# Altium PCB SOIL_MOISTURE_3IN.PcbDoc
Units mil, origin at the board's own origin, x right, y up, seen from the top; angles counter-clockwise.
Board outline 3380 x 2540 mil, 2 copper layers (Top Layer, Bottom Layer); 47 components, 41 nets, 152 pads, 34 vias.
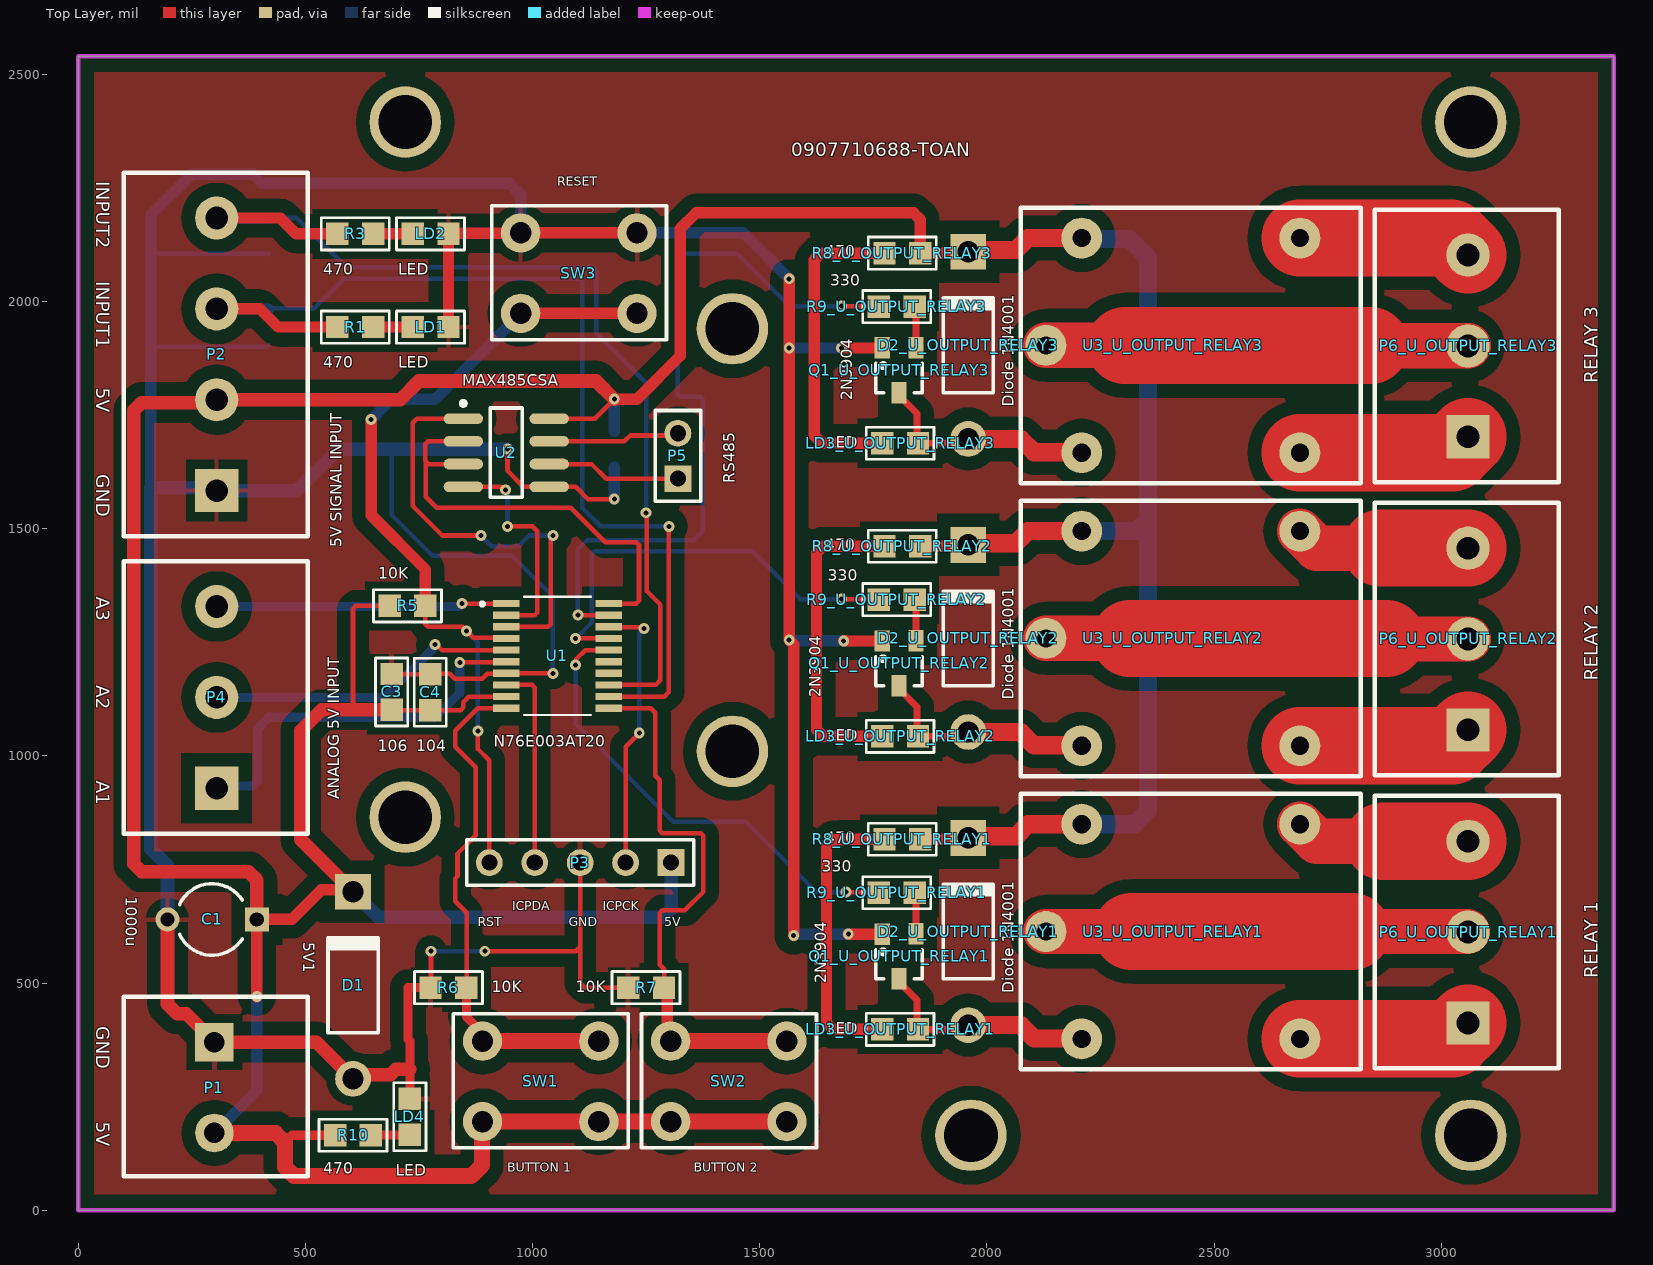
[diagram p0: Top Layer view]
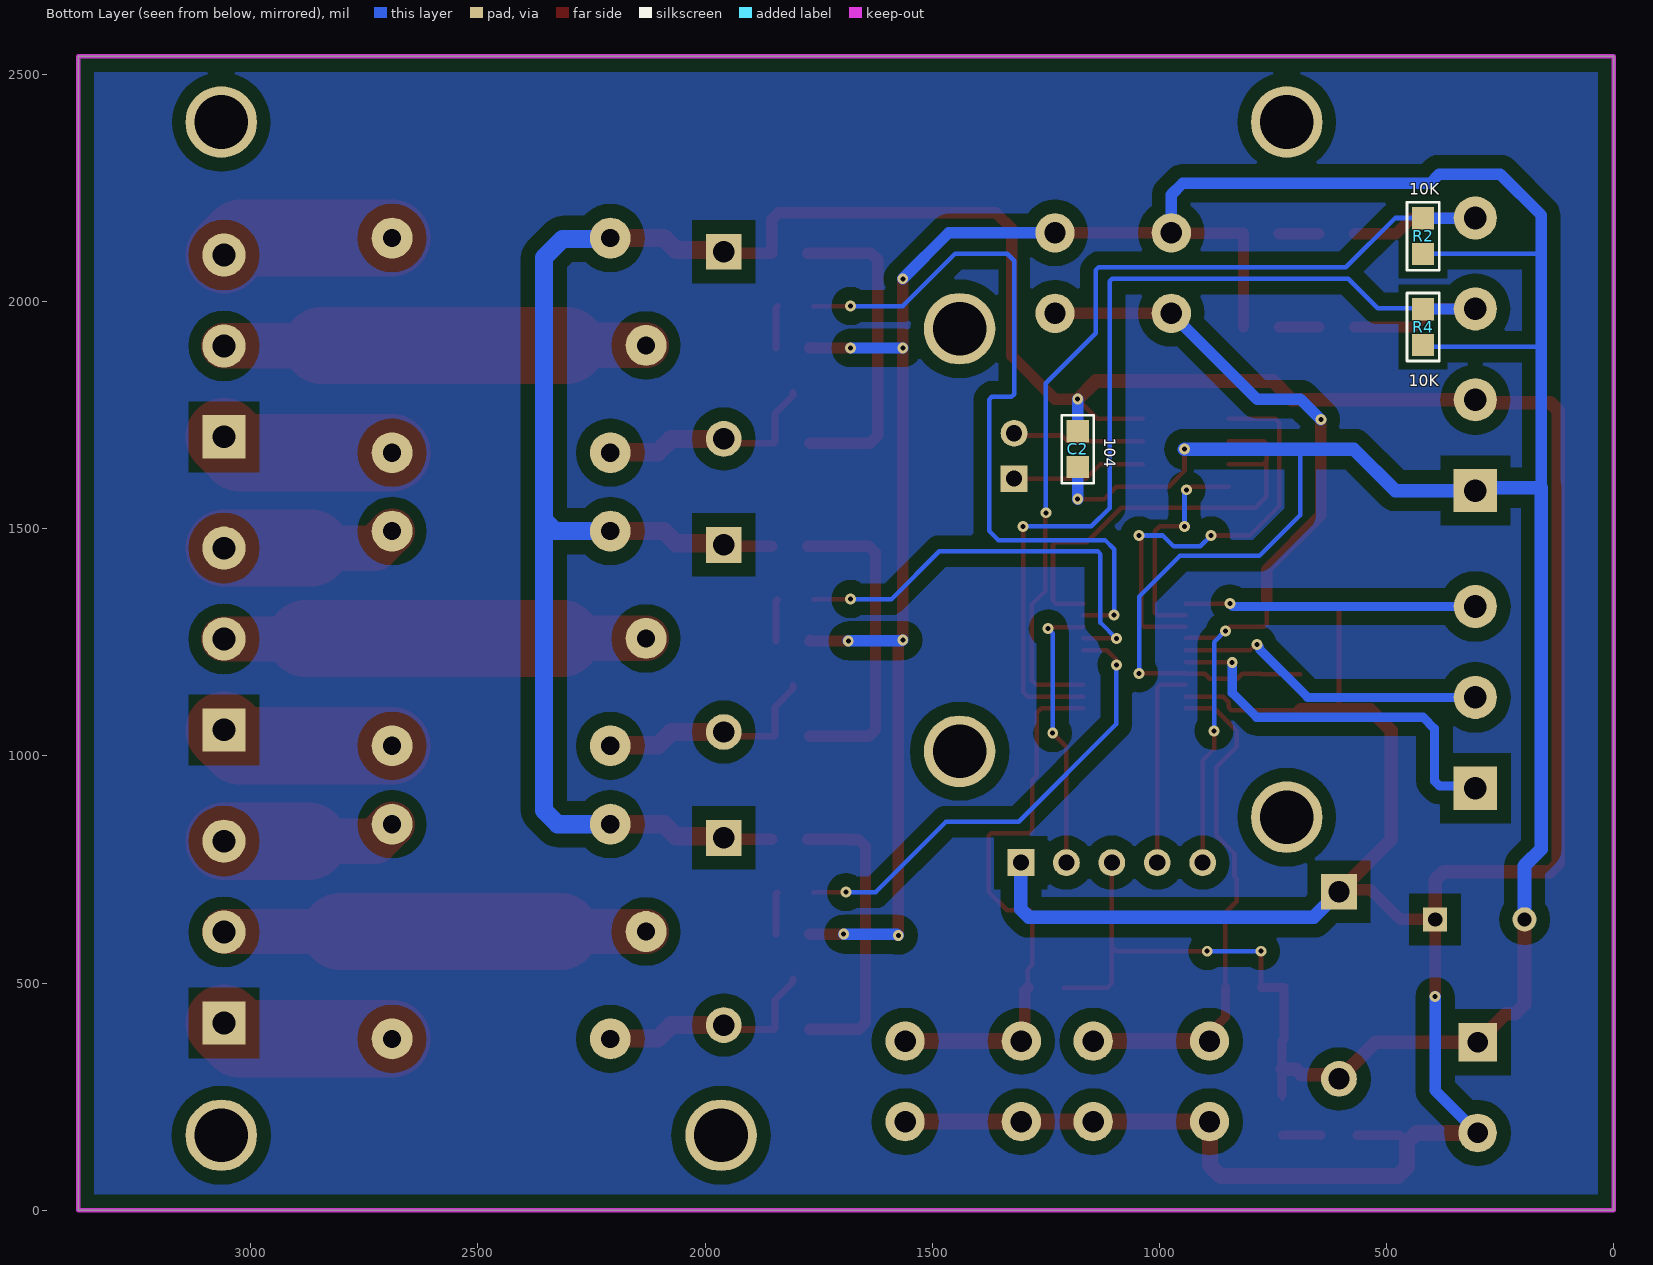
[diagram p1: Bottom Layer view, seen from below]

## Layer stack, top to bottom
Top Solder: solder mask 0.4, Solder Resist, Dk 3.5
Top Layer: signal copper 1.4
Dielectric 1: dielectric 12.6, FR-4, Dk 4.8
Bottom Layer: signal copper 1.4
Bottom Solder: solder mask 0.4, Solder Resist, Dk 3.5

## Board outline
0,0 3380,0 3380,2540 0,2540

## Design rules (kind name [scope] priority, off if disabled: settings)
Clearance Clearance_POLYGON_POUR [InPolygon] p1: gap=30 ignorepadtopadclearanceinfootprint=FALSE
Clearance [All] p2: gap=7 ignorepadtopadclearanceinfootprint=FALSE
ComponentClearance [All] p1: gap=5 collisioncheckmode=3 verticalgap=10 showdistances=FALSE
HoleSize [All] p1: absolutevalues=TRUE maxlimit=400 minlimit=1 maxpercent=80.000 minpercent=20.000
MinimumSolderMaskSliver [All] p1: minsoldermaskwidth=3
PlaneClearance [All] p1: clearance=30
PolygonConnect [All] p1: connectstyle=Relief reliefconductorwidth=10 reliefentries=4 polygonreliefangle="90 Angle" airgapwidth=20
RoutingVias [All] p1: holewidth=11 width=24 viastyle="Through Hole" minholewidth=11 minwidth=24 maxholewidth=11 maxwidth=24
SilkToSilkClearance [All] p1: silktosilkclearance=0
SilkToSolderMaskClearance [IsPad] p1: minsilkscreentomaskgap=1 clearancetoexposedcopper=TRUE
SolderMaskExpansion [All] p1: expansion=10
Width PWR [(InNet('3V3') or InNet('+5') or InNet('GND'))] p1: maxlimit=200 minlimit=10 preferedwidth=15 minimp=50.000000 maximp=50.000000 favimp=50.000000
Width [All] p2: maxlimit=200 minlimit=8 preferedwidth=10 minimp=50.000000 maximp=50.000000 favimp=50.000000
24 further rules are at their usual default settings.

## Classes and differential pairs
channel class OUTPUT_RELAY: U_OUTPUT_RELAY1 U_OUTPUT_RELAY2 U_OUTPUT_RELAY3
net class OUTPUT[1..3]: OUTPUT1 OUTPUT2 OUTPUT3
component class U_SOIL_MOISTURE_3IN: C1 C2 C3 C4 D1 LD1 LD2 LD4 P1 P2 P3 P4 P5 R1 R2 R3 R4 R5 R6 R7 R10 SW1 SW2 SW3 U1 U2
component class U_OUTPUT_RELAY3: D2_U_OUTPUT_RELAY3 LD3_U_OUTPUT_RELAY3 P6_U_OUTPUT_RELAY3 Q1_U_OUTPUT_RELAY3 R8_U_OUTPUT_RELAY3 R9_U_OUTPUT_RELAY3 U3_U_OUTPUT_RELAY3
component class U_OUTPUT_RELAY2: D2_U_OUTPUT_RELAY2 LD3_U_OUTPUT_RELAY2 P6_U_OUTPUT_RELAY2 Q1_U_OUTPUT_RELAY2 R8_U_OUTPUT_RELAY2 R9_U_OUTPUT_RELAY2 U3_U_OUTPUT_RELAY2
component class U_OUTPUT_RELAY1: D2_U_OUTPUT_RELAY1 LD3_U_OUTPUT_RELAY1 P6_U_OUTPUT_RELAY1 Q1_U_OUTPUT_RELAY1 R8_U_OUTPUT_RELAY1 R9_U_OUTPUT_RELAY1 U3_U_OUTPUT_RELAY1

## Components (designator, comment, footprint, x,y, rotation, side; value= is the part's Value field where it differs from the comment)
C1 "1000u" CAPR5-4X5 295,640 r180 top
C2 "104" Resistor 1180,1675 r270 bottom
C3 "106" Resistor 690,1140.63 r90 top
C4 "104" Resistor 775,1140 r90 top
D1 "5V1" DO-41 605,495 r90 top
D2_U_OUTPUT_RELAY1 "Diode 1N4001" DO-41 1959.06,613.39 r90 top (schematic designator D2)
D2_U_OUTPUT_RELAY2 "Diode 1N4001" DO-41 1959.06,1258.39 r90 top (schematic designator D2)
D2_U_OUTPUT_RELAY3 "Diode 1N4001" DO-41 1959.06,1903.39 r90 top (schematic designator D2)
LD1 "LED" LED_SMD 736.26,1943.74 r0 top
LD2 "LED" LED_SMD 736.26,2148.74 r0 top
LD3_U_OUTPUT_RELAY1 "LED" LED_SMD 1769.65,397.95 r0 top (schematic designator LD3)
LD3_U_OUTPUT_RELAY2 "LED" LED_SMD 1769.65,1042.95 r0 top (schematic designator LD3)
LD3_U_OUTPUT_RELAY3 "LED" LED_SMD 1769.65,1687.95 r0 top (schematic designator LD3)
LD4 "LED" LED_SMD 730,166.26 r90 top
P1 "POWER" "2 PIN TERMINAL" 300,370 r270 top
P2 "5V SIGNAL INPUT" "4 PIN TERMINAL" 305,1583.74 r90 top
P3 "PROG" HDR1X5 1305,765 r180 top
P4 "ANALOG 5V INPUT" "3 PIN TERMINAL" 305,928.74 r90 top
P5 "RS485" HDR1X2 1320,1610 r90 top
P6_U_OUTPUT_RELAY1 "Header 2" "3 PIN TERMINAL" 3059.06,412.17 r90 top (schematic designator P6)
P6_U_OUTPUT_RELAY2 "Header 2" "3 PIN TERMINAL" 3059.06,1057.17 r90 top (schematic designator P6)
P6_U_OUTPUT_RELAY3 "Header 2" "3 PIN TERMINAL" 3059.06,1702.17 r90 top (schematic designator P6)
Q1_U_OUTPUT_RELAY1 "2N3904" SOT23C 1806.65,558.74 r180 top (schematic designator Q1)
Q1_U_OUTPUT_RELAY2 "2N3904" SOT23C 1806.65,1203.74 r180 top (schematic designator Q1)
Q1_U_OUTPUT_RELAY3 "2N3904" SOT23C 1806.65,1848.74 r180 top (schematic designator Q1)
R1 "470" Resistor 610,1943.74 r0 top
R2 "10K" Resistor 420,2143.74 r270 bottom
R3 "470" Resistor 610,2148.74 r0 top
R4 "10K" Resistor 420,1943.74 r270 bottom
R5 "10K" Resistor 725,1330 r180 top
R6 "10K" Resistor 815,490 r0 top
R7 "10K" Resistor 1250,490 r0 top
R8_U_OUTPUT_RELAY1 "470" Resistor 1814.06,816.34 r180 top (schematic designator R8)
R8_U_OUTPUT_RELAY2 "470" Resistor 1814.06,1461.34 r180 top (schematic designator R8)
R8_U_OUTPUT_RELAY3 "470" Resistor 1814.06,2106.34 r180 top (schematic designator R8)
R9_U_OUTPUT_RELAY1 "330" Resistor 1801.65,698.74 r0 top (schematic designator R9)
R9_U_OUTPUT_RELAY2 "330" Resistor 1801.65,1343.74 r0 top (schematic designator R9)
R9_U_OUTPUT_RELAY3 "330" Resistor 1801.65,1988.74 r0 top (schematic designator R9)
R10 "470" Resistor 605,165 r0 top
SW1 "SW4 KT" SW4_6x6x8mm 1145.91,372.07 r180 top
SW2 "SW4 KT" SW4_6x6x8mm 1560,372.07 r180 top
SW3 "SW4 KT" SW4_6x6x8mm 1230,2150.9 r180 top
U1 "N76E003AT20" *SOP65P640X120-20N 1055,1220 r0 top
U2 "MAX485CSA" NSO8_N 942.2,1667.17 r0 top
U3_U_OUTPUT_RELAY1 "RELAY 5V TRIGGER" "RELAY 5V TRIGGER" 2130,613.39 r0 top (schematic designator U3)
U3_U_OUTPUT_RELAY2 "RELAY 5V TRIGGER" "RELAY 5V TRIGGER" 2130,1258.39 r0 top (schematic designator U3)
U3_U_OUTPUT_RELAY3 "RELAY 5V TRIGGER" "RELAY 5V TRIGGER" 2130,1903.39 r0 top (schematic designator U3)

## Footprints (in the part's own frame and the unit in brackets; to place one, negate y for a bottom-side part, rotate by r counter-clockwise, add the part's x,y. Pads: shape width x height; smd on the part's side, far side on the other; paste and mask are expansions set on the pad)
"2 PIN TERMINAL" [mil]
  rect 85x85 hole 45: 1(0,0)
  round 85 hole 45: 2(200,0)
  silkscreen extent -100,-200 295,205
"3 PIN TERMINAL" [mil]
  rect 95x95 hole 50: 1(0,0)
  round 95 hole 50: 2(200,0) 3(400,0)
  silkscreen extent -100,-200 500,205
"4 PIN TERMINAL" [mil]
  rect 95x95 hole 50: 1(0,0)
  round 95 hole 50: 2(200,0) 3(400,0) 4(600,0)
  silkscreen extent -100,-200 700,205
*SOP65P640X120-20N [mm]
  rect 1.48x0.41 smd: 1(-2.865,2.925) 2(-2.865,2.275) 3(-2.865,1.625) 4(-2.865,0.975) 5(-2.865,0.325) 6(-2.865,-0.325) 7(-2.865,-0.975) 8(-2.865,-1.625) 9(-2.865,-2.275) 10(-2.865,-2.925) 11(2.865,-2.925) 12(2.865,-2.275) 13(2.865,-1.625) 14(2.865,-0.975) 15(2.865,-0.325) 16(2.865,0.325) 17(2.865,0.975) 18(2.865,1.625) 19(2.865,2.275) 20(2.865,2.925)
  silkscreen extent -4.3,-3.3 1.87,3.3
CAPR5-4X5 [mm] "Capacitor; 2 Leads"
  rect 1.35x1.35 hole 0.8: 1(-2.5,0)
  round 1.35 hole 0.8: 2(2.5,0)
  silkscreen extent -1.69,-2 1.82,2
DO-41 [mm] "Diode, Axial; Body 5.2 x 2.7 mm (LxDia. max), Lead Dia. 0.86 mm (max)"
  round 2 hole 1.2: 1(-5.23,0)
  rect 2x2 hole 1.2: 2(5.23,0)
  silkscreen extent -2.65,-1.4 2.75,1.4
HDR1X2 [mm] "Connector; Header; 2 Position"
  rect 1.5x1.5 hole 0.9: 1(0,0)
  round 1.5 hole 0.9: 2(2.54,0)
  silkscreen extent -1.27,-1.27 3.81,1.27
HDR1X5 [mm] "Connector; Header; 5 Position"
  rect 1.5x1.5 hole 0.9: 1(0,0)
  round 1.5 hole 0.9: 2(2.54,0) 3(5.08,0) 4(7.62,0) 5(10.16,0)
  silkscreen extent -1.27,-1.27 11.43,1.27
LED_SMD [mm]
  rect 1.25x1.25 smd: 1(0,0) 2(2,0)
  silkscreen extent -0.9,-0.9 2.9,0.9
NSO8_N [mm] "SOIC, 8-Leads, Body 4.9x3.9mm, Pitch 1.27mm, IPC Medium Density"
  oval 2.2x0.6 smd: 1(-2.4,1.905) 2(-2.4,0.635) 3(-2.4,-0.635) 4(-2.4,-1.905) 5(2.4,-1.905) 6(2.4,-0.635) 7(2.4,0.635) 8(2.4,1.905)
  silkscreen extent -2.52,-2.5 0.9,2.88, body extent -2,-2.5 2,2.5, height 1.75
"RELAY 5V TRIGGER" [mil]
  round 90 hole 40: 1(78.74,236.22) 2(78.74,-236.22) 3(0,0) 4(559.06,-236.22) 5(559.06,236.22)
  silkscreen extent -55,-303 693,303
Resistor [mm] "0805"
  rect 1.25x1.25 smd: 1(-1,0) 2(1,0)
  silkscreen extent -1.9,-0.9 1.9,0.9
SOT23C [mm] "SOT 23C - 2-3-1 - BCE"
  rect 0.85x1.2 smd: 1(0.94,-1.245) 2(-0.95,-1.25) 3(0,1.25)
  silkscreen extent -1.3,-0.38 1.3,1.25, body extent -1.45,-1.4 1.45,1.4, height 1.3
SW4_6x6x8mm [mm]
  round 2.2 hole 1.2: 1(0,0) 1(6.5,0) 2(0,4.5) 2(6.5,4.498)
  silkscreen extent -1.65,-1.52 8.13,5.97, body extent -0.15,-0.86 6.65,5.34, height 8

## Part data
C1: library part Cap2, "Capacitor", PackageDescription="Capacitor; 2 Leads", PackageReference=CAPR5-4X5, Published=23-Sep-2002, Publisher="Altium Limited"
C2 C3 C4: library part "Cap Pol3", "Polarized Capacitor (Surface Mount)", LatestRevisionDate=29-May-2009, LatestRevisionNote="IPC-7351 Footprint Added.", PackageDescription="Chip Capacitor", PackageReference=C0805, Published=8-Jun-2000, Publisher="Altium Limited"
D1: library part "D Zener", "Zener Diode", LatestRevisionDate=17-Jul-2002, LatestRevisionNote="Re-released for DXP Platform.", PackageDescription="Diode, Thru-Hole; 2 Leads; 0.7 in Pin Spacing", PackageReference=DIODE-0.7, Published=8-Jun-2000, Publisher="Altium Limited"
D2_U_OUTPUT_RELAY1 D2_U_OUTPUT_RELAY2 D2_U_OUTPUT_RELAY3: "1 Amp General Purpose Rectifier", Code_JEDEC=DO-204-AL, ComponentLink1Description="Manufacturer Link", ComponentLink1URL=http://www.fairchildsemi.com/, ComponentLink2Description=Datasheet, ComponentLink2URL=http://www.fairchildsemi.com/ds/1N%2F1N4001.pdf, DatasheetVersion=1998, LatestRevisionDate=17-Jul-2002, LatestRevisionNote="Re-released for DXP Platform.", PackageDescription="Diode, Axial; Body 5.2 x 2.7 mm (LxDia. max), Lead Dia. 0.86 mm (max)", PackageReference=DO-41, PackageVersion=Aug-1999, Published=8-Jun-2000, Publisher="Altium Limited"
LD1 LD2 LD3_U_OUTPUT_RELAY1 LD3_U_OUTPUT_RELAY2 LD3_U_OUTPUT_RELAY3 LD4: library part LED_SMD, "0805", LatestRevisionDate=17-Jul-2002, LatestRevisionNote="Re-released for DXP Platform.", Publisher="Altium Limited"
P1: library part "2 PIN TERMINAL", "Header, 2-Pin", LatestRevisionDate=17-Jul-2002, LatestRevisionNote="Re-released for DXP Platform.", Publisher="Altium Limited"
P2: library part "4 PIN TERMINAL", "Header, 4-Pin", LatestRevisionDate=17-Jul-2002, LatestRevisionNote="Re-released for DXP Platform.", Publisher="Altium Limited"
P3: library part "Header 5", "Header, 5-Pin", LatestRevisionDate=17-Jul-2002, LatestRevisionNote="Re-released for DXP Platform.", Publisher="Altium Limited"
P4 P6_U_OUTPUT_RELAY1 P6_U_OUTPUT_RELAY2 P6_U_OUTPUT_RELAY3: library part "3 PIN TERMINAL", "Header, 2-Pin", LatestRevisionDate=17-Jul-2002, LatestRevisionNote="Re-released for DXP Platform.", Publisher="Altium Limited"
P5: library part "Header 2", "Header, 2-Pin", LatestRevisionDate=17-Jul-2002, LatestRevisionNote="Re-released for DXP Platform.", Publisher="Altium Limited"
Q1_U_OUTPUT_RELAY1 Q1_U_OUTPUT_RELAY2 Q1_U_OUTPUT_RELAY3: "NPN General Purpose Amplifier", PackageDocument=Sep-1998, Code_JEDEC=TO-92A, ComponentLink1Description="Manufacturer Link", ComponentLink1URL=http://www.fairchildsemi.com/, ComponentLink2Description=Datasheet, ComponentLink2URL=http://www.fairchildsemi.com/ds/2N%2F2N3904.pdf, DatasheetDocument=1997, LatestRevisionDate=15-Jan-2003, LatestRevisionNote="PCB Footprint 'BCY-W3/D4.7' replaced", PackageReference=TO-92A, Published=8-Jun-2000, Publisher="Altium Limited"
R1 R2 R3 R4 R5 R6 R7 R8_U_OUTPUT_RELAY1 R8_U_OUTPUT_RELAY2 R8_U_OUTPUT_RELAY3 R9_U_OUTPUT_RELAY1 R9_U_OUTPUT_RELAY2 R9_U_OUTPUT_RELAY3 R10: library part Resistor, "Resistor", LatestRevisionDate=17-Jul-2002, LatestRevisionNote="Re-released for DXP Platform.", Publisher="Altium Limited"
U1: "8051 Mcu, Shape: t", Package=None, Availability=Unavailable, MF=Nuvoton, MP=N76E003AT20-T, Price=None, SnapEDA_Link=https://www.snapeda.com/parts/N76E003AT20-T/Nuvoton/view-part/?ref=snap
U2: "Low-Power, Slew-Rate-Limited RS-485/RS-422 Transceiver", Code_IPC=SOIC127P600-8, Code_JEDEC=MS-012-AA, ComponentLink1Description="Manufacturer Link", ComponentLink1URL=http://www.maxim-ic.com/, ComponentLink2Description=Datasheet, ComponentLink2URL=http://pdfserv.maxim-ic.com/en/ds/MAX1487-MAX491.pdf, DatasheetVersion=Feb-1996, LatestRevisionDate=13-Apr-2006, LatestRevisionNote="IPC-7351 Footprint Added.", PackageDescription="8-Pin Small Outline Integrated Circuit 1.27 mm Pitch", PackageReference=NSO8, Published=16-Jan-2001, Publisher="Altium Limited"
U3_U_OUTPUT_RELAY1 U3_U_OUTPUT_RELAY2 U3_U_OUTPUT_RELAY3: "Header, 2-Pin", LatestRevisionDate=17-Jul-2002, LatestRevisionNote="Re-released for DXP Platform.", Publisher="Altium Limited"

## Free pads (board coordinates)
  round 157.48 hole 118.11: ""(720,865) ""(720,2395) ""(1440,1010) ""(1440,1940) ""(1965,165) ""(3065,165) ""(3065,2395)

## Via types
v1: diameter 24, hole 11, Top Layer to Bottom Layer, 34 vias

## Nets (pads, with @x,y where several pads share a name; then routed paths per layer and width w, separated by ;. In a path a pad name is that pad's centre, name@x,y a point inside that pad or via, vN(x,y) a via of type N, cw(c..) or ccw(c..) an arc to the next point about the centre after c; other vN are vias at no path point)
+5: C1.1 C2.1 C3.1 C4.1 D1.2 D2_U_OUTPUT_RELAY1.2 D2_U_OUTPUT_RELAY2.2 D2_U_OUTPUT_RELAY3.2 P1.2 P2.2 P3.1 R5.2 R8_U_OUTPUT_RELAY1.1 R8_U_OUTPUT_RELAY2.1 R8_U_OUTPUT_RELAY3.1 R10.1 SW1.2 SW2.2 U1.9 U2.8 U3_U_OUTPUT_RELAY1.1 U3_U_OUTPUT_RELAY2.1 U3_U_OUTPUT_RELAY3.1 | length 10929.9
  Top Layer w10: 455,149.5 464.52,159.02 ; R10.1@559.65,159.02 R10.1 ; 605,1101.26 605,1324.14 610.86,1330 R5.2 ; C3.1@690,1100.63 C4.1 841.86,1100.63 847.72,1106.49 847.72,1118.15 860,1130.43 U1.9 ; U2.8 1137.17,1742.17 v1(1180,1785) ; SW2.2@1559.95,194.95 SW2.2@1560,194.91
  Top Layer w20: 464.52,159.02 470.5,165 R10.1
  Top Layer w25: v1(393.43,470) C1.1 470,640 535,705 D1.2@600.91,705 ; v1(1180,1785) 1230,1785 1325,1880 1325,2160 1360,2195 1838.78,2195 1853.43,2180.36 R8_U_OUTPUT_RELAY3.1 1956.1,2106.34 D2_U_OUTPUT_RELAY3.2 ; R8_U_OUTPUT_RELAY1.1 1956.1,816.34 D2_U_OUTPUT_RELAY1.2 ; R8_U_OUTPUT_RELAY2.1 1956.1,1461.34 D2_U_OUTPUT_RELAY2.2
  Top Layer w30: C1.1 393.43,726.57 375,745 140.07,745 122.5,762.57 122.5,1759.93 140.07,1777.5 298.76,1777.5 P2.2 708.74,1783.74 750,1825 1140,1825 v1(1180,1785) ; D1.2 600.91,705 490,815.91 490,1055 536.26,1101.26 605,1101.26 689.37,1101.26 C3.1@690,1100.63
  Top Layer w35: P1.2 434.5,170 455,149.5 455,95.5 475.5,75 865,75 889.19,99.19 889.19,194.19 890,195 890.05,194.95 1145.86,194.95 1145.91,194.91 1145.95,194.95 1304.05,194.95 1304.09,195 1304.14,194.95 SW2.2@1559.95,194.95
  Top Layer w40: D2_U_OUTPUT_RELAY1.2 1962.72,822.95 2064.06,822.95 2090.71,849.61 U3_U_OUTPUT_RELAY1.1 ; D2_U_OUTPUT_RELAY2.2 1962.72,1467.95 2064.06,1467.95 2090.71,1494.61 U3_U_OUTPUT_RELAY2.1 ; D2_U_OUTPUT_RELAY3.2 1962.72,2112.95 2064.06,2112.95 2090.71,2139.61 U3_U_OUTPUT_RELAY3.1
  Bottom Layer w25: P1.2 393.43,263.43 v1(393.43,470) ; C2.1 v1(1180,1785)
  Bottom Layer w30: D1.2 660.91,645 1287.43,645 1305,662.57 P3.1
  Bottom Layer w40: U3_U_OUTPUT_RELAY1.1 2325,849.61 2355,879.61 2355,1519.61 ; U3_U_OUTPUT_RELAY2.1 2330,1494.61 2355,1519.61 ; U3_U_OUTPUT_RELAY3.1 2210.52,2137.83 2313.74,2137.83 2355,2096.57 2355,1519.61
AIN0: P4.1 U1.6 | length 858.7
  Top Layer w10: v1(840,1205) 841.1,1206.1 941.1,1206.1 U1.6
  Bottom Layer w20: P4.1 309.54,933.28 383.28,933.28 395,945 395,1060 420,1085 786.26,1085 840,1138.74 v1(840,1205)
AIN1: P4.2 U1.5 | length 693.3
  Top Layer w10: v1(785,1245) 788.79,1245 800.99,1232.8 U1.5
  Bottom Layer w20: P4.2 673.74,1128.74 780,1235 780,1238.92 785,1243.92 v1(785,1245)
AIN4: P4.3 U1.1 | length 639.9
  Top Layer w10: v1(845,1335) 845.08,1335.08 942.13,1335.08 U1.1
  Bottom Layer w20: P4.3 838.74,1328.74 v1(845,1335)
BUTTON_1: R6.2 SW1.1 U1.10 | length 1134.3
  Top Layer w10: R6.2 855,490.63 855,655 830,680 830,730 835,735 835,785 875,825 875,975 830,1020 830,1055 879.84,1104.84 U1.10
  Top Layer w20: R6.2 854.37,425.73 890,390.1 SW1.1@890,372.07
  Top Layer w35: SW1.1@890,372.07 SW1.1@1145.91,372.07
BUTTON_2: R7.2 SW2.1 U1.11 | length 1257.8
  Top Layer w10: U1.11 1260.16,1104.84 1270,1095 1270,956.18 1280,946.18 1280,835.86 1285.86,830 1370.4,830 1376.26,824.14 1376.26,701.26 1335,660 1285.86,660 1280,654.14 1280,540 1290,530 1290,490.63 R7.2
  Top Layer w25: R7.2 1296.73,482.64 1296.73,379.43 SW2.1@1304.09,372.07
  Top Layer w35: SW2.1@1304.09,372.07 SW2.1@1560,372.07
DE: U1.20 U2.2 U2.3 | length 993.3
  Top Layer w10: U2.3 771.57,1642.17 765,1648.74 ; U2.2 770.23,1692.17 764.37,1686.31 764.37,1649.37 765,1648.74 ; U1.20 1228.59,1335.16 1234.45,1341.02 1234.45,1464.14 1228.59,1470 1160,1470 1084.14,1545.86 789.14,1545.86 765,1570 765,1648.74
GND: C1.2 C2.2 C3.2 C4.2 D1.1 LD1.2 LD2.2 LD4.2 P1.1 P2.1 P3.3 Q1_U_OUTPUT_RELAY1.1 Q1_U_OUTPUT_RELAY2.1 Q1_U_OUTPUT_RELAY3.1 R2.2 R4.2 R6.1 R7.1 SW3.1 U1.7 U2.5 | length 10291.5
  Top Layer w10: C3.2 774.37,1180 C4.2 776.63,1181 817.87,1181 828.87,1170 889.35,1170 900.35,1181 941.59,1181 U1.7 v1(1045,1181.61) ; LD4.2 LD4.2@730,255 ; R6.1 776.63,491 v1(776.63,570) ; v1(895,570) 1095,570 1105,580 ; v1(945,1675) 945,1627.17 980,1592.17 U2.5 1095,1592.17 1122.17,1565 v1(1180,1565) ; P3.3 1105,580 ; R7.1 1115,490 1105,500 1105,580
  Top Layer w20: LD4.2@730,255 730,310 730,372.82 726.02,376.79 726.02,490 R6.1
  Top Layer w25: LD1.2 LD2.2 816.08,2149.82 973.01,2149.82 974.09,2150.9 SW3.1@1230,2150.9 ; v1(1565,2050) v1(1565,1897.74) v1(1565,1255) 1575,1245 v1(1575,605) ; v1(1680,1897.74) Q1_U_OUTPUT_RELAY3.1 Q1_U_OUTPUT_RELAY3.1@1769.44,1897.95 ; v1(1685,1252.95) 1689.21,1252.95 1689.43,1252.74 Q1_U_OUTPUT_RELAY2.1 Q1_U_OUTPUT_RELAY2.1@1767.39,1255 ; v1(1695,607.74) Q1_U_OUTPUT_RELAY1.1 Q1_U_OUTPUT_RELAY1.1@1769.44,607.95
  Top Layer w30: C1.2 196.57,453.43 217.79,432.21 237.79,432.21 P1.1 524.09,370 D1.1 614.33,298.42 687.52,298.42 699.09,310 730,310
  Bottom Layer w10: 160,1900 415.63,1900 R4.2 ; 160,2105 419.37,2105 R2.2 ; 690,1675 690,1530 780,1440 955,1440 1045,1350 v1(1045,1181.61) ; v1(776.63,570) v1(895,570)
  Bottom Layer w25: 160,1590 160,1900 160,2105 160,2190 250,2280 385,2280 405,2260 949.09,2260 974.09,2235 SW3.1@974.09,2150.9 ; v1(1180,1565) C2.2 ; SW3.1@1230,2150.9 1464.1,2150.9 v1(1565,2050) ; v1(1565,1255) 1567.05,1252.95 v1(1685,1252.95) ; v1(1565,1897.74) v1(1680,1897.74) ; v1(1575,605) 1577.74,607.74 v1(1695,607.74)
  Bottom Layer w30: C1.2 196.57,758.43 160,795 160,1590 298.74,1590 P2.1 481.26,1583.74 572.52,1675 690,1675 v1(945,1675)
ICPCK: P3.2 U1.18 | length 610.4
  Top Layer w10: U1.18 1169.09,1282.68 1242.32,1282.68 v1(1245,1280) ; P3.2 1205,1020 v1(1235,1050)
  Bottom Layer w10: v1(1235,1050) 1235,1270 v1(1245,1280)
ICPDA: P3.4 U1.8 | length 450.4
  Top Layer w10: U1.8 999.14,1156.02 1005,1150.17 P3.4
INPUT_1: P2.3 R1.1 R4.1 U1.12 | length 2324
  Top Layer w10: U1.12 1290,1130.43 1300,1140.43 v1(1300,1505)
  Top Layer w25: P2.3 400,1983.74 440,1943.74 R1.1
  Bottom Layer w10: R4.1@419.68,1983.42 421.26,1985 520,1985 585,2050 1104.14,2050 1110,2044.14 1110,1545 1150,1505 v1(1300,1505)
  Bottom Layer w25: P2.3 305.31,1983.42 R4.1@419.68,1983.42
INPUT_2: P2.4 R2.1 R3.1 U1.13 | length 2242
  Top Layer w10: U1.13 1271.18,1156.02 1281.14,1165.98 1281.14,1333.03 1251.45,1362.72 1251.45,1533.55 v1(1250,1535)
  Top Layer w25: P2.4 445,2183.74 480,2148.74 R3.1
  Bottom Layer w10: R2.1@419.69,2183.42 420,2183.74 481.26,2183.74 590,2075 1134.14,2075 1140,2069.14 1140,1930 1250,1820 v1(1250,1535)
  Bottom Layer w25: P2.4 305.32,2183.42 R2.1@419.69,2183.42
NetD2_U_OUTPUT_RELAY1_1: D2_U_OUTPUT_RELAY1.1 LD3_U_OUTPUT_RELAY1.2 Q1_U_OUTPUT_RELAY1.3 U3_U_OUTPUT_RELAY1.2 | length 505.7
  Top Layer w15: Q1_U_OUTPUT_RELAY1.3 1806.65,502.64 1846.34,462.95 1846.34,400.01 LD3_U_OUTPUT_RELAY1.2 1949.53,397.95 D2_U_OUTPUT_RELAY1.1
  Top Layer w40: D2_U_OUTPUT_RELAY1.1 2074.53,407.48 2103.74,378.27 2207.64,378.27 U3_U_OUTPUT_RELAY1.2
NetD2_U_OUTPUT_RELAY2_1: D2_U_OUTPUT_RELAY2.1 LD3_U_OUTPUT_RELAY2.2 Q1_U_OUTPUT_RELAY2.3 U3_U_OUTPUT_RELAY2.2 | length 505.7
  Top Layer w15: Q1_U_OUTPUT_RELAY2.3 1806.65,1147.64 1846.34,1107.95 1846.34,1045.01 LD3_U_OUTPUT_RELAY2.2 1949.53,1042.95 D2_U_OUTPUT_RELAY2.1
  Top Layer w40: D2_U_OUTPUT_RELAY2.1 2074.53,1052.48 2103.74,1023.27 2207.64,1023.27 U3_U_OUTPUT_RELAY2.2
NetD2_U_OUTPUT_RELAY3_1: D2_U_OUTPUT_RELAY3.1 LD3_U_OUTPUT_RELAY3.2 Q1_U_OUTPUT_RELAY3.3 U3_U_OUTPUT_RELAY3.2 | length 505.7
  Top Layer w15: Q1_U_OUTPUT_RELAY3.3 1806.65,1792.64 1846.34,1752.95 1846.34,1690.01 LD3_U_OUTPUT_RELAY3.2 1949.53,1687.95 D2_U_OUTPUT_RELAY3.1
  Top Layer w40: D2_U_OUTPUT_RELAY3.1 2074.53,1697.48 2103.74,1668.27 2207.64,1668.27 U3_U_OUTPUT_RELAY3.2
NetLD1_1: LD1.1 R1.2 | length 86.9
  Top Layer w25: R1.2 LD1.1
NetLD2_1: LD2.1 R3.2 | length 86.9
  Top Layer w25: R3.2 LD2.1
NetLD3_U_OUTPUT_RELAY1_1: LD3_U_OUTPUT_RELAY1.1 R8_U_OUTPUT_RELAY1.2 | length 650.7
  Top Layer w25: LD3_U_OUTPUT_RELAY1.1 1661.69,397.95 1647.05,412.6 1647.05,800.36 1661.69,815 1683.31,815 1684.64,816.34 R8_U_OUTPUT_RELAY1.2
NetLD3_U_OUTPUT_RELAY2_1: LD3_U_OUTPUT_RELAY2.1 R8_U_OUTPUT_RELAY2.2 | length 695.6
  Top Layer w25: LD3_U_OUTPUT_RELAY2.1 1639.64,1042.95 1625,1057.6 1625,1446.69 1639.64,1461.34 R8_U_OUTPUT_RELAY2.2
NetLD3_U_OUTPUT_RELAY3_1: LD3_U_OUTPUT_RELAY3.1 R8_U_OUTPUT_RELAY3.2 | length 704.2
  Top Layer w25: LD3_U_OUTPUT_RELAY3.1 1637.05,1687.95 1620,1705 1620,2091.69 1634.64,2106.34 R8_U_OUTPUT_RELAY3.2
NetLD4_1: LD4.1 R10.2 | length 86.7
  Top Layer w10: LD4.1@728.74,165 LD4.1
  Top Layer w20: R10.2 645,165.63 728.11,165.63 LD4.1@728.74,165
NetP5_1: P5.1 U2.6 | length 296.6
  Top Layer w10: U2.6 1130,1642.17 1162.17,1610 P5.1
NetP5_2: P5.2 U2.7 | length 290.7
  Top Layer w10: U2.7 1202.17,1692.17 1215,1705 1315,1705 P5.2
NetP6_U_OUTPUT_RELAY1_1: P6_U_OUTPUT_RELAY1.1 U3_U_OUTPUT_RELAY1.4 | length 384.5
  Top Layer w170: U3_U_OUTPUT_RELAY1.4 3024.06,377.17 P6_U_OUTPUT_RELAY1.1
NetP6_U_OUTPUT_RELAY1_2: P6_U_OUTPUT_RELAY1.2 U3_U_OUTPUT_RELAY1.3 | length 927.8
  Top Layer w100: U3_U_OUTPUT_RELAY1.3 2318.78,613.39 ; 2803.39,613.39 P6_U_OUTPUT_RELAY1.2@3057.83,613.39
  Top Layer w170: 2318.78,613.39 2803.39,613.39
NetP6_U_OUTPUT_RELAY1_3: P6_U_OUTPUT_RELAY1.3 U3_U_OUTPUT_RELAY1.5 | length 385.5
  Top Layer w100: U3_U_OUTPUT_RELAY1.5 2726.5,812.17 2872.17,812.17
  Top Layer w170: 2872.17,812.17 P6_U_OUTPUT_RELAY1.3
NetP6_U_OUTPUT_RELAY2_1: P6_U_OUTPUT_RELAY2.1 U3_U_OUTPUT_RELAY2.4 | length 384.5
  Top Layer w170: U3_U_OUTPUT_RELAY2.4 3024.06,1022.17 P6_U_OUTPUT_RELAY2.1
NetP6_U_OUTPUT_RELAY2_2: P6_U_OUTPUT_RELAY2.2 U3_U_OUTPUT_RELAY2.3 | length 929.6
  Top Layer w100: U3_U_OUTPUT_RELAY2.3 2315,1258.39 ; 2878.78,1258.39 2880,1257.17 P6_U_OUTPUT_RELAY2.2
  Top Layer w170: 2315,1258.39 2878.78,1258.39
NetP6_U_OUTPUT_RELAY2_3: P6_U_OUTPUT_RELAY2.3 U3_U_OUTPUT_RELAY2.5 | length 385.5
  Top Layer w100: U3_U_OUTPUT_RELAY2.5 2726.5,1457.17 2867.17,1457.17
  Top Layer w170: 2867.17,1457.17 P6_U_OUTPUT_RELAY2.3
NetP6_U_OUTPUT_RELAY3_1: P6_U_OUTPUT_RELAY3.1 U3_U_OUTPUT_RELAY3.4 | length 384.5
  Top Layer w170: U3_U_OUTPUT_RELAY3.4 3024.06,1667.17 P6_U_OUTPUT_RELAY3.1
NetP6_U_OUTPUT_RELAY3_2: P6_U_OUTPUT_RELAY3.2 U3_U_OUTPUT_RELAY3.3 | length 929.6
  Top Layer w100: U3_U_OUTPUT_RELAY3.3 2303.78,1903.39 ; 2843.78,1903.39 2845,1902.17 P6_U_OUTPUT_RELAY3.2
  Top Layer w170: 2303.78,1903.39 2843.78,1903.39
NetP6_U_OUTPUT_RELAY3_3: P6_U_OUTPUT_RELAY3.3 U3_U_OUTPUT_RELAY3.5 | length 385.5
  Top Layer w170: U3_U_OUTPUT_RELAY3.5 3021.61,2139.61 P6_U_OUTPUT_RELAY3.3
NetQ1_U_OUTPUT_RELAY1_2: Q1_U_OUTPUT_RELAY1.2 R9_U_OUTPUT_RELAY1.2 | length 92
  Top Layer w15: R9_U_OUTPUT_RELAY1.2 1844.06,695.71 Q1_U_OUTPUT_RELAY1.2
NetQ1_U_OUTPUT_RELAY2_2: Q1_U_OUTPUT_RELAY2.2 R9_U_OUTPUT_RELAY2.2 | length 92
  Top Layer w15: R9_U_OUTPUT_RELAY2.2 1844.06,1340.71 Q1_U_OUTPUT_RELAY2.2
NetQ1_U_OUTPUT_RELAY3_2: Q1_U_OUTPUT_RELAY3.2 R9_U_OUTPUT_RELAY3.2 | length 92
  Top Layer w15: R9_U_OUTPUT_RELAY3.2 1844.06,1985.71 Q1_U_OUTPUT_RELAY3.2
OUTPUT1: R9_U_OUTPUT_RELAY1.1 U1.16 | length 1044.4
  Top Layer w10: v1(1095,1200) 1095,1211.94 1115.86,1232.8 U1.16 ; v1(1690,700) 1761.02,700 R9_U_OUTPUT_RELAY1.1
  Bottom Layer w10: v1(1095,1200) 1095,1070 1310,855 1470,855 1625,700 v1(1690,700)
OUTPUT2: R9_U_OUTPUT_RELAY2.1 U1.17 | length 951.8
  Top Layer w10: v1(1095,1258.39) U1.17 ; v1(1680,1345) 1761.02,1345 R9_U_OUTPUT_RELAY2.1
  Bottom Layer w10: v1(1095,1258.39) 1130,1293.39 1130,1444.14 1135.86,1450 1485,1450 1590,1345 v1(1680,1345)
OUTPUT3: R9_U_OUTPUT_RELAY3.1 U1.19 | length 1644.6
  Top Layer w10: v1(1100,1309.57) U1.19 ; v1(1680,1990) 1761.02,1990 R9_U_OUTPUT_RELAY3.1
  Bottom Layer w10: v1(1100,1309.57) 1100,1455 1120,1475 1355,1475 1375,1495 1375,1784.14 1369.14,1790 1325.86,1790 1320,1795.86 1320,2090 1335,2105 1450,2105 1565,1990 v1(1680,1990)
RESET: P3.5 R5.1 SW3.2 U1.4 | length 1903.1
  Top Layer w10: R5.1 764.37,1289.83 770.23,1283.98 846.02,1283.98 v1(855,1275) 870,1260 940.59,1260 U1.4 ; v1(880,1055) 880,1015 905,990 P3.5
  Top Layer w25: v1(645,1740) 645,1529.37 764.37,1410 R5.1 ; SW3.2@974.09,1973.83 974.14,1973.79 1229.95,1973.79 SW3.2@1230,1973.74
  Bottom Layer w10: v1(855,1275) 880,1250 v1(880,1055)
  Bottom Layer w25: v1(645,1740) 690,1785 785.26,1785 SW3.2@974.09,1973.83
RX: U1.3 U2.1 | length 951.3
  Top Layer w10: U2.1 745,1742.17 736.26,1733.43 736.26,1550 801.26,1485 v1(886.34,1485) ; U1.3 1034.14,1283.98 1040,1289.83 1040,1480 v1(1045,1485)
  Bottom Layer w10: v1(886.34,1485) 910.03,1461.31 969.14,1461.31 992.83,1485 v1(1045,1485)
TX: U1.2 U2.4 | length 497.3
  Top Layer w10: U2.4 930.23,1592.17 936.8,1585.59 v1(940.59,1585.59) ; U1.2 1004.58,1309.57 1010.43,1315.42 1010.43,1494.17 999.61,1505 v1(945,1505)
  Bottom Layer w10: v1(940.59,1585.59) 940.59,1584.41 945,1580 v1(945,1505)
pads on no net: U1.14 U1.15

## Polygon pours and split planes (outlines as drawn)
GND on Top Layer (solid, pour order 0): 0,0 0,2540 3380,2540 3380,0
no net on Bottom Layer (solid, pour order 2): 0,0 0,2540 3380,2540 3380,0

## Keep-outs
Keep-Out Layer:
  the board outline again, w10

## Silkscreen, mask and mechanical layers (free items; w line width, h text height)
Top Overlay:
  text "0907710688-TOAN" at 1570,2320 h30
  text "INPUT2" at 40,2265 h30 r270
  text "RESET" at 1055,2255 h20
  text "INPUT1" at 40,2045 h30 r270
  text "RELAY 3" at 3345,1820 h30 r90
  text "5V" at 40,1810 h30 r270
  text "GND" at 40,1620 h30 r270
  text "A3" at 40,1350 h30 r270
  text "RELAY 2" at 3345,1165 h30 r90
  text "A2" at 40,1155 h30 r270
  text "A1" at 40,945 h30 r270
  text "ICPDA" at 955,660 h20
  text "ICPCK" at 1155,660 h20
  text "RST" at 880,625 h20
  text "GND" at 1080,625 h20
  text "5V" at 1290,625 h20
  text "RELAY 1" at 3345,510 h30 r90
  text "GND" at 40,405 h30 r270
  text "5V" at 40,194.91 h30 r270
  text "BUTTON 1" at 945,85 h20
  text "BUTTON 2" at 1355,85 h20